# Altium PCB kernel.PcbDoc (part 2 of 7)
Units mil, origin at the board's own origin, x right, y up, seen from the top; angles counter-clockwise.
Board outline 2360 x 2450.34 mil, 6 copper layers (Top Layer, GND, SIGNAL, POWER, GND1, Bottom Layer), stack 32.112 mil thick; 150 components, 174 nets, 684 pads, 710 vias.
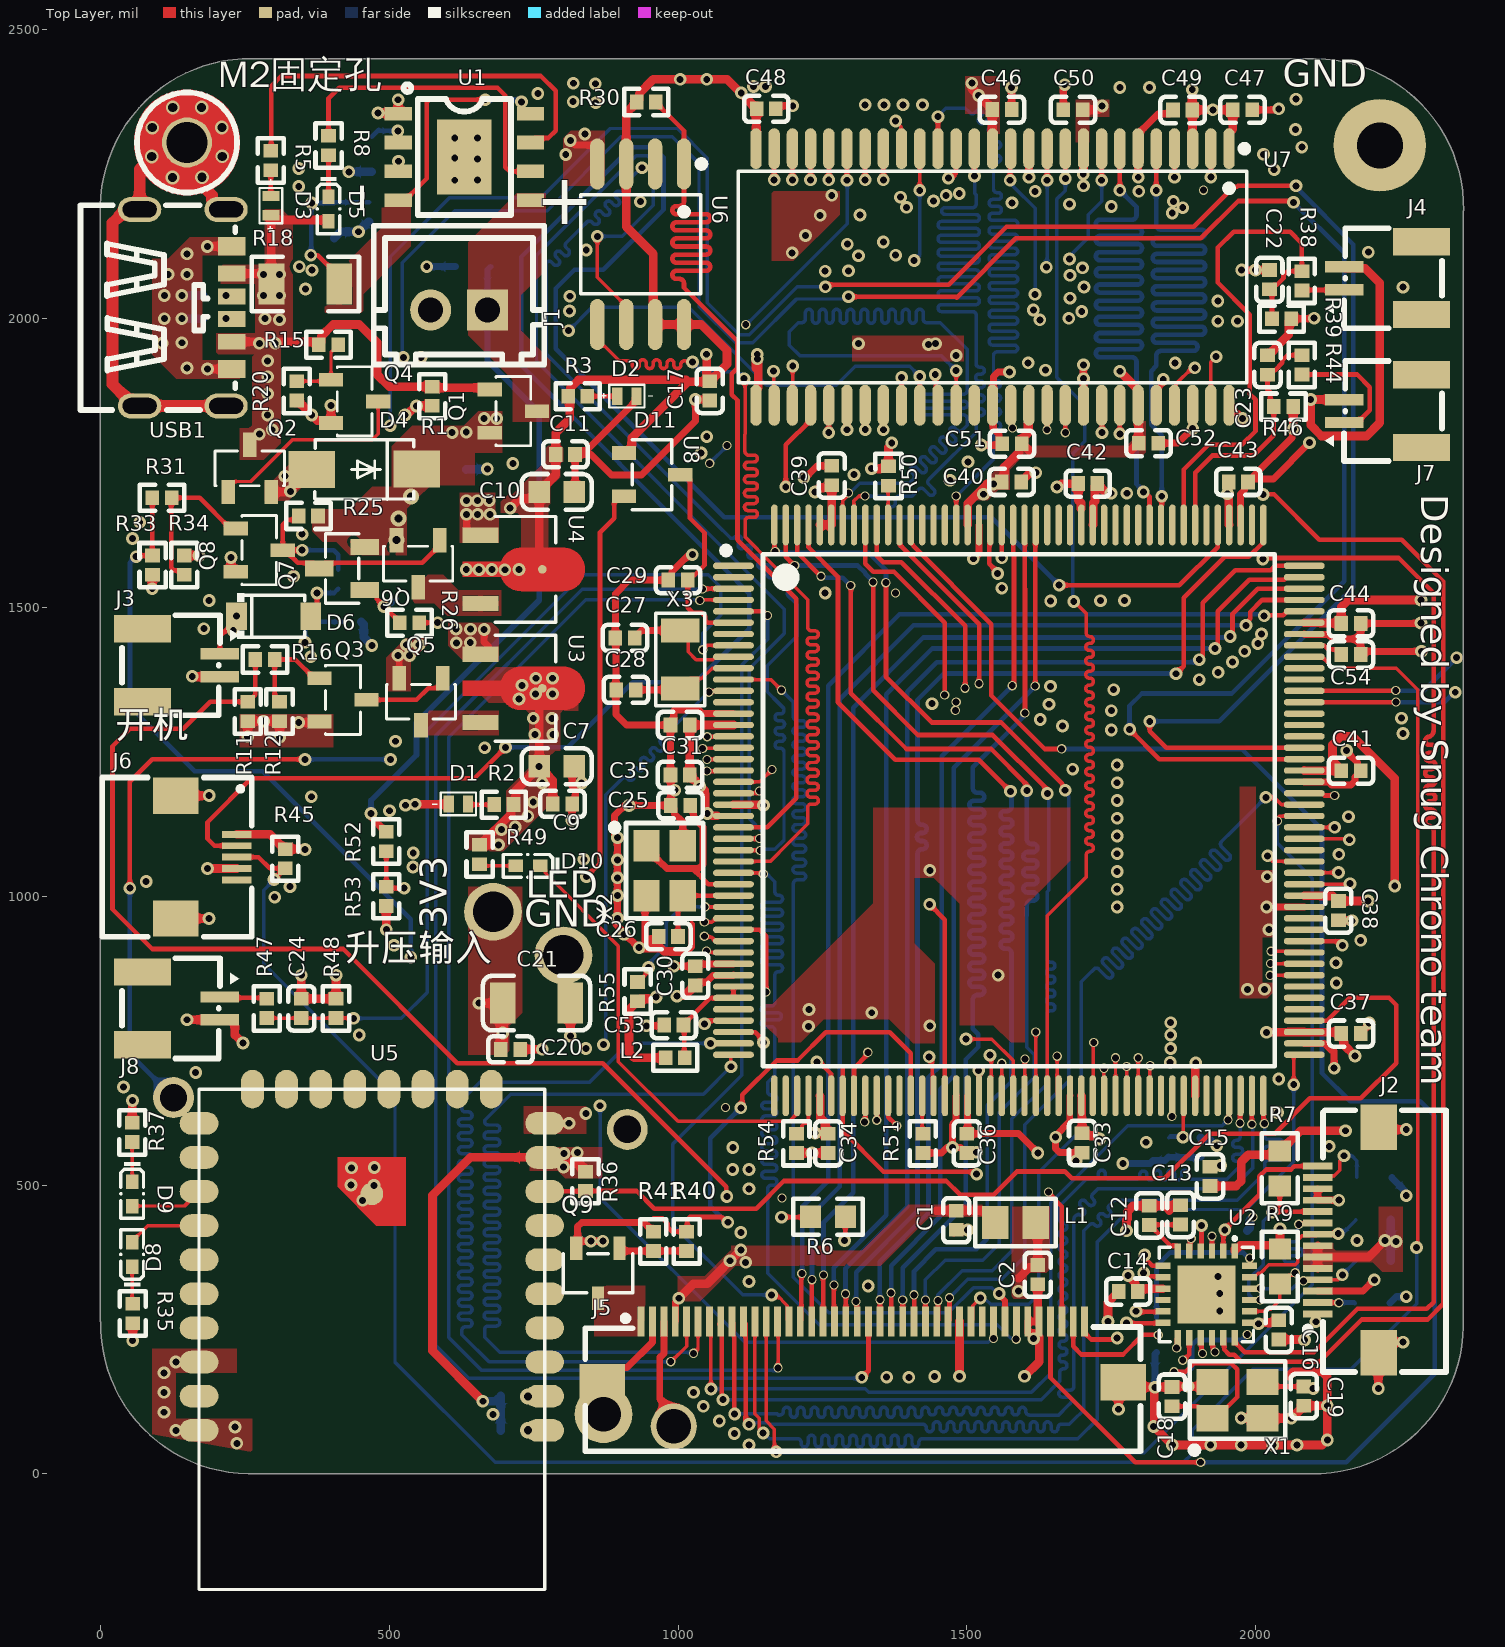
[diagram p0: Top Layer view]

## Part data (continued)
U1: library part TP4056_C725790, "锂电池充电管理IC", JLCPCB Part Class="Extended Part", Manufacturer=UMW(友台半导体), Add into BOM=yes, Convert to PCB=yes, Datasheet=https://atta.szlcsc.com/upload/public/pdf/source/20211011/37515E71BA298E23D23475482C49633D.pdf, Device=TP4056_C725790, LCSC Part Name=TP4056, Manufacturer Part=TP4056, Name=TP4056, Supplier=LCSC, Supplier Footprint=ESOP-8, Supplier Part=C725790, Symbol=TP4056_C725790
U2: "ETHER_PHY", JLCPCB Part Class="Extended Part", LCSC Part Name="小型RMIl 10/100以太网收发器，支持HP Auto-MDIX", Manufacturer=MICROCHIP(美国微芯), Operating Temperature=0℃~+85℃, Voltage - Supply=1.6V~3.6V, Add into BOM=yes, Applications Function=PHY收发器, Convert to PCB=yes, Datasheet=https://item.szlcsc.com/datasheet/LAN8720A-CP-TR/46225.html, Device=LAN8720A-CP-TR, Interface=RMII, Manufacturer Part=LAN8720A-CP-TR, Number of Channels=-, Supplier=LCSC, Supplier Footprint=QFN-24-EP(4x4), Supplier Part=C45223, Symbol=LAN8720A-CP-TR
U3 U4: library part AMS1117-3.3V_C5120796, JLCPCB Part Class="Extended Part", LCSC Part Name="输入18V 输出3.3V 1A", Manufacturer=MSKSEMI(美森科), Operating Temperature=0℃~+125℃, Output Current=1A, Output Voltage=3.3V, standby current=12mA, Voltage - Supply=18V, Voltage Dropout=1.4V@(1A), Add into BOM=yes, Convert to PCB=yes, Datasheet=https://item.szlcsc.com/datasheet/AMS1117-3.3V/5706251.html, Device=AMS1117-3.3V_C5120796, Manufacturer Part=AMS1117-3.3V, Number of Outputs=1, Output Configuration=正极, Output Type=固定, Supplier=LCSC, Supplier Footprint=SOT-89, Supplier Part=C5120796, Symbol=AMS1117-3.3V_C5120796
U6: "QSPI Norflash", Clock Frequency=133MHz, JLCPCB Part Class="Basic Part", LCSC Part Name="编带 支持双路/四路SPI接口的3V、128Mbit 串行闪存", Manufacturer=Winbond(华邦), Operating Temperature=-40℃~+85℃, Standby Supply Current=1uA, Voltage - Supply=2.7V~3.6V, Add into BOM=yes, Block Erase Time(tBE)=120ms@(32KB), Convert to PCB=yes, Data Retention - TDR (Year)=20年, Datasheet=https://item.szlcsc.com/datasheet/W25Q128JVSIQ/98729.html, Device=W25Q128JVSIQ, Interface=SPI, Manufacturer Part=W25Q128JVSIQ, Memory Size=128Mbit, Page Programming Time (Tpp)=3ms, Program / Erase Cycles=100000次, Supplier=LCSC, Supplier Footprint=SOIC-8-208mil, Supplier Part=C97521, Symbol=W25Q128JVSIQTR
U7: "SDRAM", Clock Frequency=166MHz, JLCPCB Part Class="Extended Part", LCSC Part Name=4M×4存储体×16位SDRAM, Manufacturer=Winbond(华邦), Operating Temperature=0℃~+70℃, Voltage - Supply=3V~3.6V, Add into BOM=yes, Convert to PCB=yes, Datasheet=https://item.szlcsc.com/datasheet/W9825G6KH-6/63303.html, Device=W9825G6KH-6, Manufacturer Part=W9825G6KH-6, Memory Size=256Mbit, Supplier=LCSC, Supplier Footprint=TSOP-54-10.2mm, Supplier Part=C62246, Symbol=W9825G6KH-6
U8: "主控", JLCPCB Part Class="Extended Part", LCSC Part Name="带DSP和FPU的高性能高级系列ARM Cortex-M4 MCU，具有1 MB Flash、180 MHz CPU、ART加速器、Chrom-ART加速器、TFT、带SDRAM", Manufacturer=ST(意法半导体), Voltage - Supply=1.8V~3.6V, ADC (Bit)=12bit, Add into BOM=yes, Applications=-, Convert to PCB=yes, CPU Core=ARM-M4, CPU Maximum Speed=180MHz, DAC (Bit)=12bit, Datasheet=https://item.szlcsc.com/datasheet/STM32F429IGT6/55346.html, Device=STM32F429IGT6, Manufacturer Part=STM32F429IGT6, Number of I/O=140, Program Memory Type=FLASH, Program Storage Size=1MB, Supplier=LCSC, Supplier Footprint=LQFP-176(24x24), Supplier Part=C54328, Symbol=STM32F429IGT6
USB1: Core Colour=黑色, Current Rating - Power (Max)=5A, JLCPCB Part Class="Extended Part", LCSC Part Name="Type-C 母 卧贴", Manufacturer="SHOU HAN(首韩)", Operating Temperature Range=-40℃~+85℃, Rated Voltage (Max)=20V, Add into BOM=yes, Connect-Disconnect Life=3千次, Connector Type=Type-C, Convert to PCB=yes, Datasheet=https://atta.szlcsc.com/upload/public/pdf/source/20201203/C456012_B13F72044DF846EDBE9BDD0D1D3CD166.pdf, Device="TYPE-C 6P", Gender=母, Manufacturer Part="TYPE-C 6P", Mounting Style=卧贴, Number of Contacts=6P, Number of Ports=1, Standard="USB 3.1", Supplier=LCSC, Supplier Footprint=SMD, Supplier Part=C456012, Symbol="TYPE-C 6P"
X1 X2: library part XL2EL89CSI-111YLC-25M, "25Mhz", Designer=U?, Device=X322516MLB4SI, Symbol=X322516MLB4SI
X3: library part XTF32032768JT00351011, "RTC时钟晶振", Equivalent Series Resistance(ESR)=70kΩ, JLCPCB Part Class="Extended Part", LCSC Part Name="32.768KHz 2P 3215 12pF ±10ppm -40~+85℃(-0.04ppm/℃^2)", Load Capacitance=12pF, Manufacturer=同晶, Normal temperature Frequency Tolerance=±10ppm, Add into BOM=yes, Convert to PCB=yes, Datasheet=https://item.szlcsc.com/datasheet/XTF32032768JT00351011/39361295.html, Device=XTF32032768JT00351011, Manufacturer Part=XTF32032768JT00351011, Supplier=LCSC, Supplier Footprint=SMD3215-2P, Supplier Part=C37635363, Symbol=XTF32032768JT00351011, Type=贴片晶振
U5: PCB DECAL=DX-WF24

## Free pads (board coordinates)
  round 100 hole 70: 2(679.86,973.14) 4(801.63,897.69)
  round 80 hole 60: 3(992.7,82.27)
  round 160 hole 80: 3(2215,2300)
  round 100 hole 60: 6(870.93,103.24)

## Via types
v1: diameter 22, hole 12, Top Layer to Bottom Layer, tented both sides, 583 vias
v2: diameter 16, hole 12, Top Layer to Bottom Layer, tented both sides, 111 vias
v3: diameter 23.62, hole 15.75, Top Layer to Bottom Layer, 8 vias
v4: diameter 28, hole 14, Top Layer to Bottom Layer, 5 vias
v5: diameter 22, hole 12, Top Layer to Bottom Layer, 3 vias

## Nets (pads, with @x,y where several pads share a name; then routed paths per layer and width w, separated by ;. In a path a pad name is that pad's centre, name@x,y a point inside that pad or via, vN(x,y) a via of type N, cw(c..) or ccw(c..) an arc to the next point about the centre after c; other vN are vias at no path point)
15V: J5.2 J5.41 pad.6 | length 143.1
  Top Layer w12: J5.41@875,164.22 894.71,183.93 911.67,183.93 955.73,227.99 955.73,263.79 J5.2@955.83,263.88
B0: J5.21 U8.3 | length 2539.5
  Top Layer w8: v2@1041.45,1531.4 1042.36,1532.31 1095.5,1532.31 U8.3@1095.91,1532.72 ; v1(1318.04,167.13) 1318.3,167.13 1329.84,178.67 J5.21@1329.84,263.94
  Bottom Layer w6: v2@1040.88,1531.25 833.95,1531.25 580.18,1277.48 580.18,222.95 637.59,165.54 1312.47,165.54 1312.65,165.71 1316.62,165.71 v1(1318.04,167.13)
  other v2: 1042.27,1531.9
B1: J5.22 U8.155 | length 1477.1
  Top Layer w8: J5.22@1349.53,263.94 v2(1349.53,301.58) ; v2@1578.82,1364.38 1581.65,1367.21 1581.65,1542.66 1581.65,1592.42 1580.16,1593.91 U8.155@1580.16,1642.95
  Bottom Layer w8: v2(1349.53,301.58) 1349.28,301.83 1349.28,367.54 1433.55,451.81 1433.55,686.39 1456.63,709.46 1456.63,805.67 1456.63,1234.25 1456.63,1242.18 v2@1579.59,1365.14
  other v2: 1578.57,1364.63
B2: J5.23 U8.153 | length 1483.1
  Top Layer w8: v2(1368.89,313.53) 1368.89,264.27 J5.23@1369.22,263.94 ; v2@1618.56,1363.91 1618.56,1542.89 1618.38,1543.07 1618.38,1641.8 U8.153@1619.53,1642.95
  Bottom Layer w8: v2(1368.89,313.53) 1368.91,360.65 1454.2,445.94 1454.2,665.92 1477.43,689.15 1477.43,1222.78 v2@1618.56,1363.91
  other v2: 1618.31,1364.17
B3: J5.24 U8.154 | length 1971
  Top Layer w8: J5.24@1388.89,263.94 v2(1388.89,301) ; U8.154@1599.84,1642.95 1600.55,1642.24 1600.55,1531.98 1600.64,1531.89 v2@1600.64,1316.95
  Bottom Layer w8: v2(1388.89,301) 1388.89,356.89 1497.78,465.78 1497.78,717.46 1519.43,739.12 1519.43,761.49 1510.42,770.49 1510.42,803.14 1510.42,821.14 cw(c1518.42,821.14) 1518.42,829.14 1523.03,829.14 ccw(c1523.03,836.14) 1523.03,843.14 1511.42,843.14 cw(c1511.42,850.14) 1511.42,857.14 1523.03,857.14 ccw(c1523.03,864.14) 1523.03,871.14 1511.42,871.14 cw(c1511.42,878.14) 1511.42,885.14 1523.03,885.14 ccw(c1523.03,892.14) 1523.03,899.14 1511.42,899.14 cw(c1511.42,906.14) 1511.42,913.14 1523.03,913.14 ccw(c1523.03,920.14) 1523.03,927.14 1511.42,927.14 cw(c1511.42,934.14) 1511.42,941.14 1523.03,941.14 ccw(c1523.03,948.14) 1523.03,955.14 1511.42,955.14 cw(c1511.42,962.14) 1511.42,969.14 1523.03,969.14 ccw(c1523.03,976.14) 1523.03,983.14 1511.42,983.14 cw(c1511.42,990.14) 1511.42,997.14 1523.03,997.14 ccw(c1523.03,1004.14) 1523.03,1011.14 1511.42,1011.14 cw(c1511.42,1018.14) 1511.42,1025.14 1523.03,1025.14 ccw(c1523.03,1032.14) 1523.03,1039.14 1511.42,1039.14 cw(c1511.42,1046.14) 1511.42,1053.14 1523.03,1053.14 ccw(c1523.03,1060.14) 1523.03,1067.14 1511.42,1067.14 cw(c1511.42,1074.14) 1511.42,1081.14 1523.03,1081.14 ccw(c1523.03,1088.14) 1523.03,1095.14 1511.42,1095.14 cw(c1511.42,1102.14) 1511.42,1109.14 1523.03,1109.14 ccw(c1523.03,1116.14) 1523.03,1123.14 1511.42,1123.14 cw(c1511.42,1130.14) 1511.42,1137.14 1523.03,1137.14 ccw(c1523.03,1144.14) 1523.03,1151.14 1511.42,1151.14 cw(c1511.42,1158.14) 1511.42,1165.14 1523.03,1165.14 ccw(c1523.03,1172.14) 1523.03,1179.14 1518.42,1179.14 cw(c1518.42,1187.14) 1510.42,1187.14 1510.42,1209.42 1510.42,1223.09 1600.62,1313.29 v2@1600.62,1316.8
  other v2: 1600.38,1317.2
B4: J5.25 U8.173 | length 1976.6
  Top Layer w8: U8.173@1225.83,1642.95 1225.83,1603.99 1276.86,1552.97 1276.86,1336.06 1376.24,1236.68 1520.42,1236.68 v1(1575.45,1181.65) ; J5.25@1408.59,263.94 1408.92,264.29 1408.68,264.53 v2(1408.68,310)
  Bottom Layer w6: 1534.32,406.53 1534.92,407.13 1534.92,637.74 1577.31,680.12
  Bottom Layer w8: v2@1408.59,310 1408.59,351.15 1446.41,388.98 1516.77,388.98 1534.32,406.53 ; v1(1575.45,1181.65) 1577.31,1179.79 1577.31,1169.07 1577.31,1155.47 cw(c1569.31,1155.47) 1569.31,1147.47 1565.42,1147.47 ccw(c1565.42,1140.47) 1565.42,1133.47 1571.89,1133.47 cw(c1571.89,1126.47) 1571.89,1119.47 1565.42,1119.47 ccw(c1565.42,1112.47) 1565.42,1105.47 1571.89,1105.47 cw(c1571.89,1098.47) 1571.89,1091.47 1565.42,1091.47 ccw(c1565.42,1084.47) 1565.42,1077.47 1571.89,1077.47 cw(c1571.89,1070.47) 1571.89,1063.47 1565.42,1063.47 ccw(c1565.42,1056.47) 1565.42,1049.47 1571.89,1049.47 cw(c1571.89,1042.47) 1571.89,1035.47 1565.42,1035.47 ccw(c1565.42,1028.47) 1565.42,1021.47 1571.89,1021.47 cw(c1571.89,1014.47) 1571.89,1007.47 1565.42,1007.47 ccw(c1565.42,1000.47) 1565.42,993.47 1571.89,993.47 cw(c1571.89,986.47) 1571.89,979.47 1565.42,979.47 ccw(c1565.42,972.47) 1565.42,965.47 1571.89,965.47 cw(c1571.89,958.47) 1571.89,951.47 1565.42,951.47 ccw(c1565.42,944.47) 1565.42,937.47 1571.89,937.47 cw(c1571.89,930.47) 1571.89,923.47 1565.42,923.47 ccw(c1565.42,916.47) 1565.42,909.47 1569.31,909.47 cw(c1569.31,901.47) 1577.31,901.47 1577.31,897.47 1577.31,680.12
B5: J5.26 U8.174 | length 1904.2
  Top Layer w8: U8.174@1206.14,1642.95 1206.14,1595.14 1247.19,1554.09 v2(1247.71,1554.09) ; v2@1299.16,1537.76 1299.16,1351.35 1395.51,1255 1541.98,1255 1603.89,1193.09 v1(1603.89,1182.89) ; J5.26@1428.26,263.94 v2(1428.26,301.31)
  Bottom Layer w6: v2@1428.26,301.77 1428.26,336.05 1462.35,370.13 1527.28,370.13 1555.97,398.82 1555.97,625.76 1616.95,686.74 1616.95,725.63 1603.89,738.69 1603.89,966.62
  Bottom Layer w8: v2(1247.71,1554.09) 1249.87,1554.09 1252.24,1551.73 1285.2,1551.73 v2@1299.16,1537.76 ; 1603.89,966.62 1603.89,984.62 cw(c1611.89,984.62) 1611.89,992.62 1615.08,992.62 ccw(c1615.08,999.62) 1615.08,1006.62 1604.89,1006.62 cw(c1604.89,1013.62) 1604.89,1020.62 1615.08,1020.62 ccw(c1615.08,1027.62) 1615.08,1034.62 1604.89,1034.62 cw(c1604.89,1041.62) 1604.89,1048.62 1615.08,1048.62 ccw(c1615.08,1055.62) 1615.08,1062.62 1604.89,1062.62 cw(c1604.89,1069.62) 1604.89,1076.62 1615.08,1076.62 ccw(c1615.08,1083.62) 1615.08,1090.62 1611.89,1090.62 cw(c1611.89,1098.62) 1603.89,1098.62 1603.89,1130.15 v1(1603.89,1182.89)
  other v2: 1298.91,1538.02
B6: J5.27 U8.175 | length 1891.2
  Top Layer w8: U8.175@1186.46,1642.95 1186.46,1587.49 1200.63,1573.32 1201.08,1573.32 1202.16,1572.24 v2@1202.16,1571.79 ; v2(1337.72,1543.78) 1337.72,1356.9 1415.49,1279.13 1545.15,1279.13 1636.71,1187.57 1636.71,1180.47 v1(1639.38,1177.79) ; J5.27@1447.95,263.94 1450,266 v2(1450,300)
  Bottom Layer w6: v2(1450,300) 1450,309.97 1491.72,351.69 1543.85,351.69 1578.07,385.92 1578.07,614.85 1638.95,675.72 1638.95,780.79 1638.95,795.8 cw(c1644.95,795.8) 1644.95,801.8 1646.42,801.8 ccw(c1646.42,807.8) 1646.42,813.8 1643.95,813.8 cw(c1643.95,819.8) 1643.95,825.8 1646.42,825.8 ccw(c1646.42,831.8) 1646.42,837.8 1643.95,837.8 cw(c1643.95,843.8) 1643.95,849.8 1646.42,849.8 ccw(c1646.42,855.8) 1646.42,861.8 1643.95,861.8 cw(c1643.95,867.8) 1643.95,873.8 1646.42,873.8 ccw(c1646.42,879.8) 1646.42,885.8 1644.95,885.8 cw(c1644.95,891.8) 1638.95,891.8 1638.95,911.29 1638.95,1007.85 1641.67,1010.58 1641.67,1175.5 v1(1639.38,1177.79)
  Bottom Layer w8: v2@1202.93,1572.56 1311.42,1572.56 1323.81,1560.17 1323.81,1558.15 1337.72,1544.23 v2(1337.72,1543.78)
  other v2: 1201.91,1572.49
B7: J5.28 U8.176 | length 1875.6
  Top Layer w8: U8.176@1166.77,1642.95 1166.77,1598.23 v2@1170,1595 ; v2@1359.96,1542.63 1359.96,1380.27 1439.29,1300.94 1559.06,1300.94 1665.01,1194.99 1665.01,1192.55 1670.15,1187.4 v1(1670.15,1183.61) ; J5.28@1467.64,263.94 1470,266.32 v2(1470,305)
  Bottom Layer w6: v2(1470,305) 1501.75,336.75 1560.72,336.75 1600.41,376.44 1600.41,604.16 1676.81,680.56 1676.81,1172.63 1670.15,1179.28 v1(1670.15,1183.61)
  Bottom Layer w8: v2@1170,1595 1330.4,1595 1359.94,1565.46 v2@1359.94,1542.65
  other v2: 1359.71,1542.88 1168.13,1596.87
BAT_VOL: R52.1 R53.2 U8.52 | length 1326.6
  Top Layer w8: R52.1@495,1078.27 R53.2@495,1016.73 497.68,1014.05 v1(525.95,1014.05) ; U8.52@1304.57,654.77 1304.57,702.52 1327.85,725.81 1327.85,729.09 v2(1328.62,729.86)
  SIGNAL w8: v1(525.95,1014.05) 711.22,828.78 871.03,828.78 906.55,793.26 906.55,735.67 930.42,711.8 964.08,711.8 994.72,742.45 994.72,786.82 1093.41,885.5 1213.92,885.5 1328.62,770.8 v2(1328.62,729.86)
BOOT0: R50.1 U8.166 | length 68
  Top Layer w6: U8.166@1363.62,1642.95 1363.62,1710.07 R50.1@1364.27,1710.72
BOOT1: R51.1 U8.58 | length 66.2
  Top Layer w6: U8.58@1422.68,654.77 1422.68,590.31 R51.1@1423.89,589.1